# Altium PCB version2.PcbDoc
Units mm, origin at the board's own origin, x right, y up, seen from the top; angles counter-clockwise.
Board outline 110.11 x 70.14 mm, 2 copper layers (Top Layer, Bottom Layer), stack 0.711 mm thick; 36 components, 48 nets, 169 pads, 6 vias.
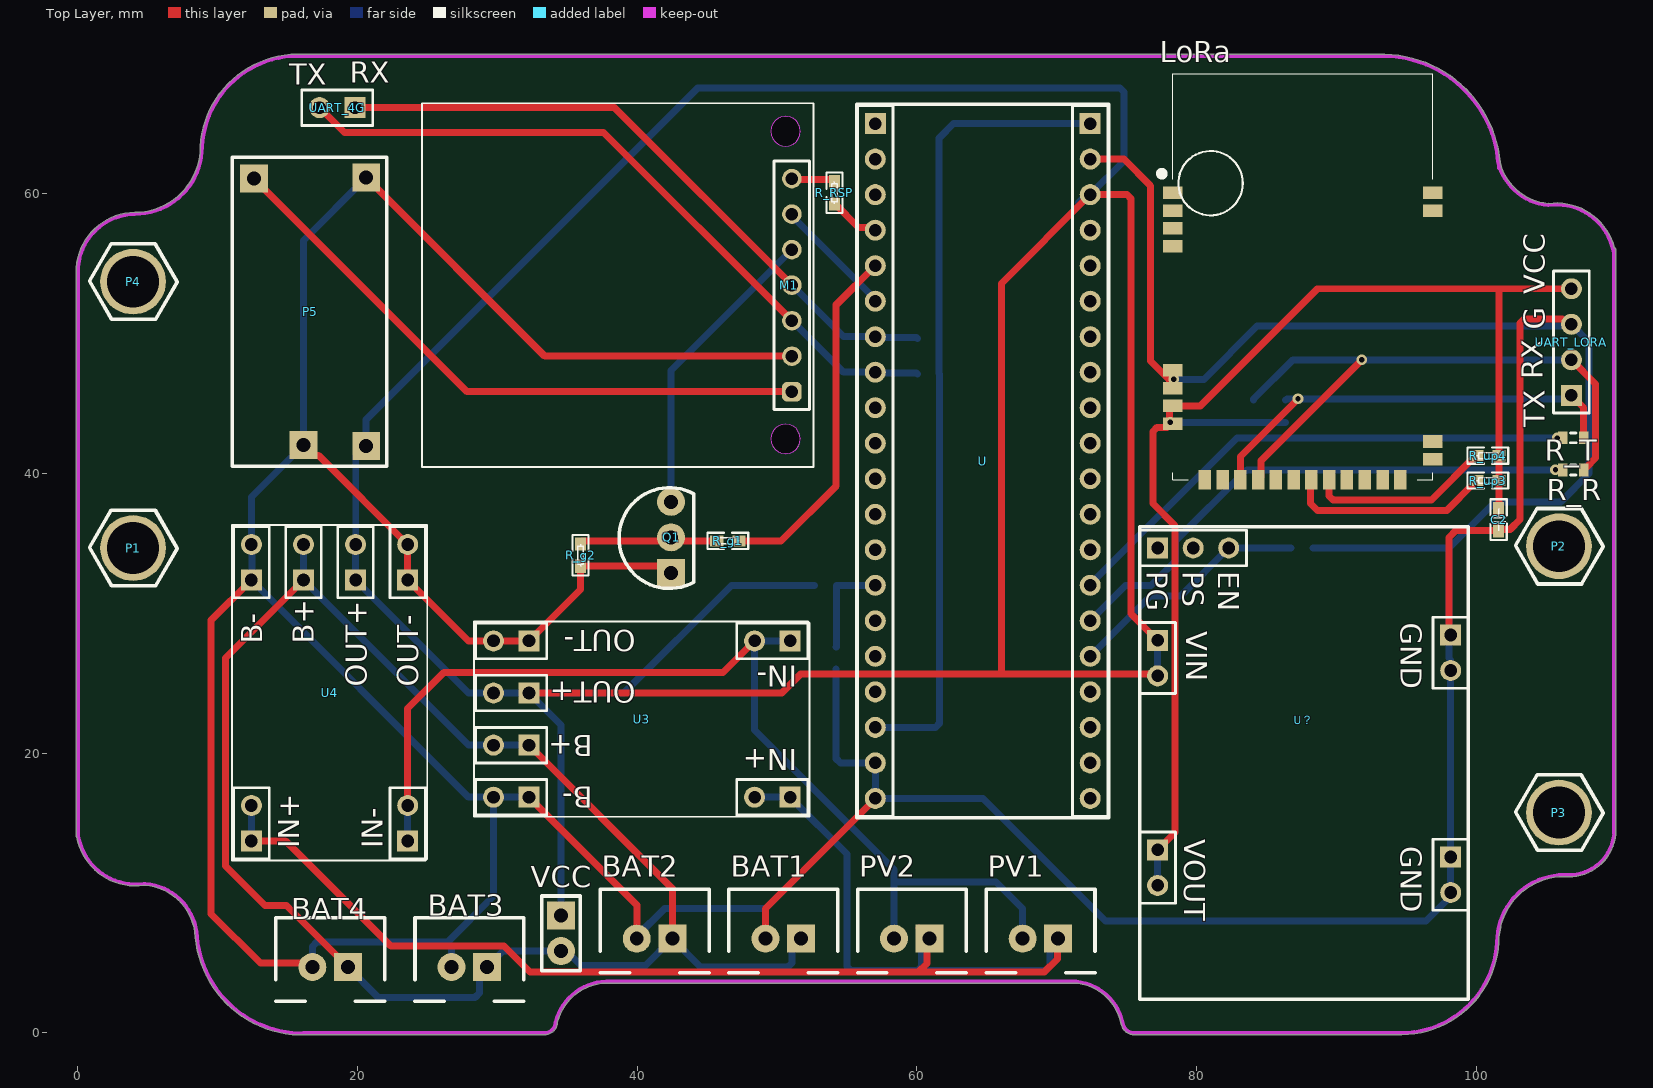
[diagram p0: Top Layer view]
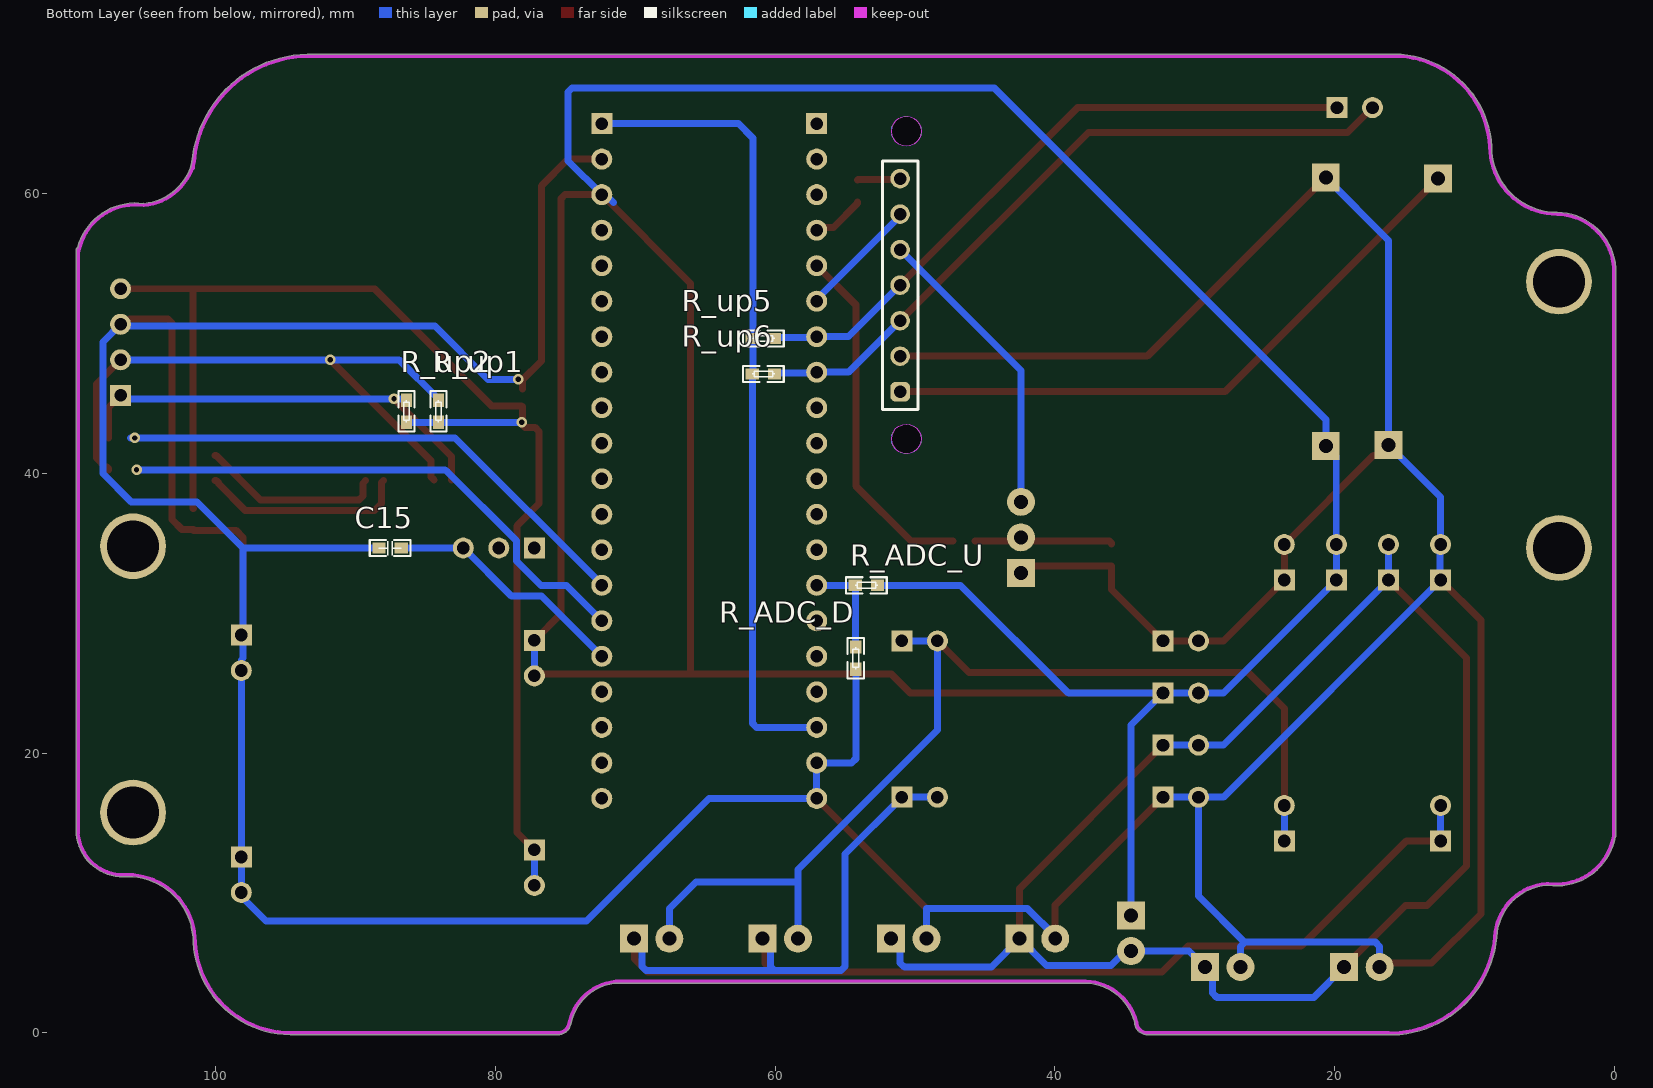
[diagram p1: Bottom Layer view, seen from below]
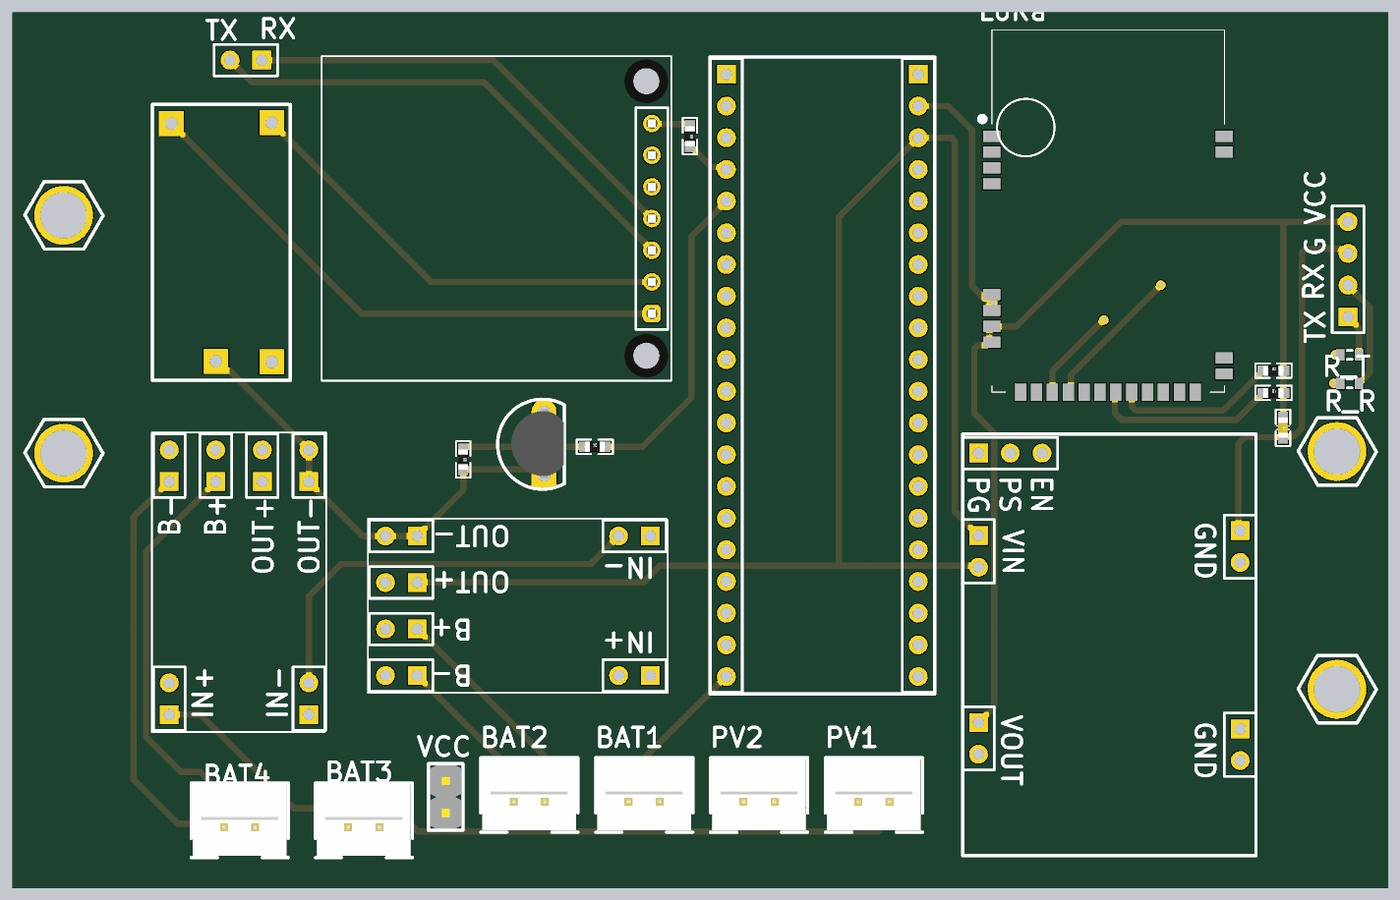
[diagram p2: 3D render of the assembled board from above, using the file's embedded part models]
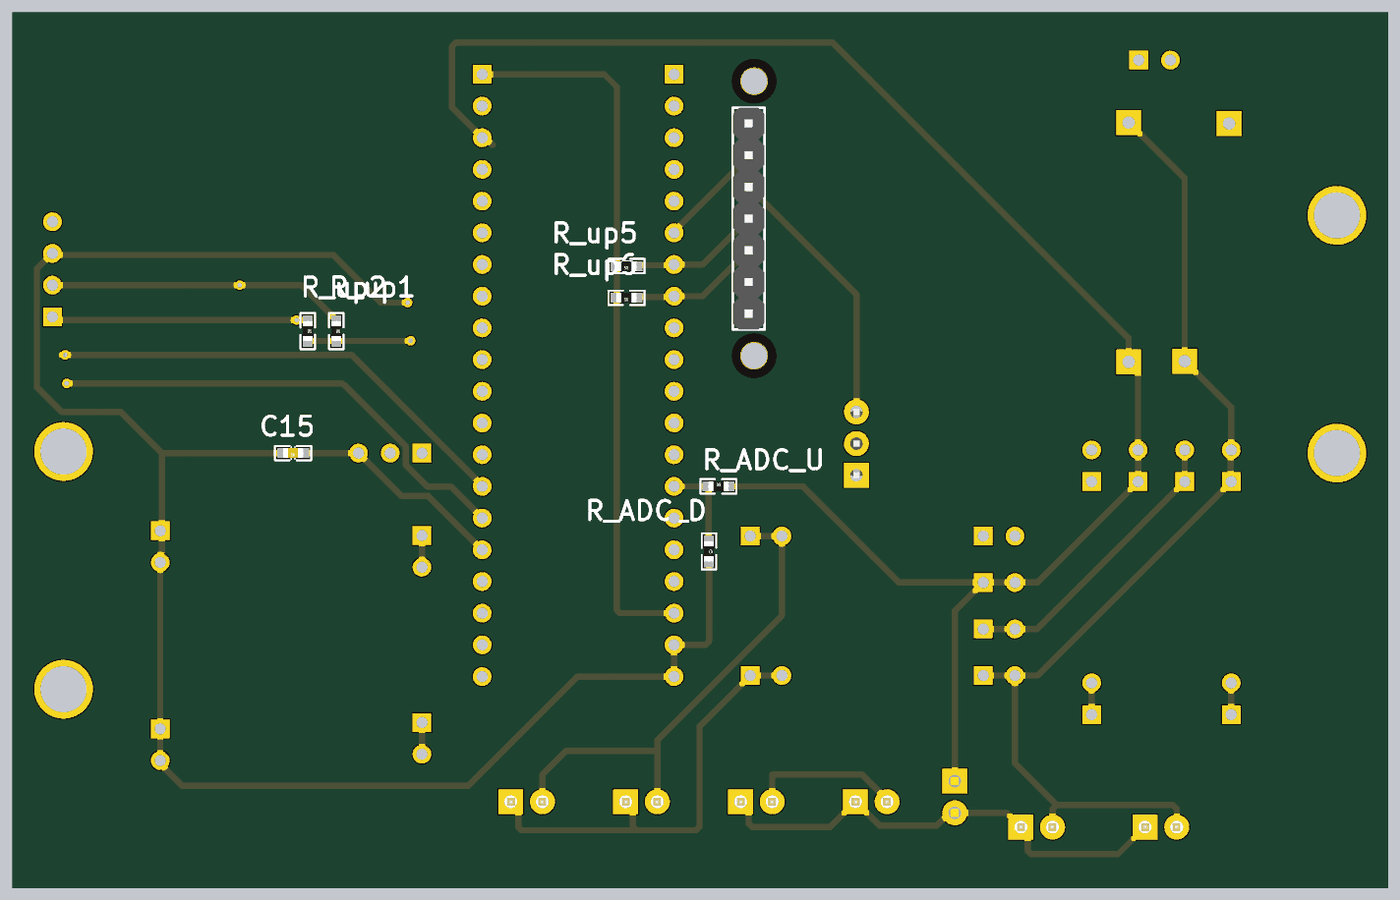
[diagram p3: 3D render of the assembled board from below, using the file's embedded part models]

## Layer stack, top to bottom
Top Solder: solder mask 0.0102, Solder Resist, Dk 3.5
Top Layer: signal copper 0.0356
Dielectric 1: dielectric 0.32, FR-4, Dk 4.8
Dielectric2: dielectric 0.32, FR-4, Dk 4.8
Bottom Layer: signal copper 0.0356
Bottom Solder: solder mask 0.0102, Solder Resist, Dk 3.5

## Board outline
8.39,6.847 cw(c8.517,6.858) 8.39,6.852 ccw(c4.508,6.667) 4.816,10.541 cw(c4.826,10.668) 4.762,10.558 cw(c4.699,10.668) 4.716,10.542 cw(c4.127,14.796) -0.095,14.012 cw(c0,14.097) -0.127,14.097 -0.127,54.356 cw(c4.127,54.419) 4.062,58.674 cw(c4.064,58.547) 4.065,58.674 ccw(c4.06,63.369) 8.754,63.369 ccw(c4.06,63.369) 8.754,63.372 cw(c8.882,63.373) 8.755,63.38 cw(c15.744,62.988) 16.133,69.977 92.961,69.977 cw(c93.281,61.531) 101.704,62.241 ccw(c105.474,63.182) 105.152,59.31 cw(c105.727,55.054) 109.885,56.131 cw(c109.855,56.007) 109.982,56.007 109.982,55.624 ccw(c109.855,55.626) 109.982,55.626 ccw(c109.855,55.626) 109.982,55.628 109.982,55.624 109.982,14.224 cw(c109.855,14.224) 109.982,14.212 cw(c106.616,14.541) 106.293,11.176 ccw(c106.303,6.481) 101.609,6.478 ccw(c106.303,6.481) 101.609,6.477 ccw(c101.481,6.477) 101.609,6.478 101.609,6.477 cw(c101.481,6.477) 101.608,6.47 cw(c94.619,6.862) 94.227,-0.127 cw(c94.234,0) 94.227,-0.127 75.572,-0.127 cw(c75.565,0) 75.572,-0.127 cw(c75.519,0.791) 74.609,0.662 cw(c74.71,0.739) 74.585,0.712 ccw(c71.038,-0.07) 70.9,3.56 cw(c70.866,3.683) 70.866,3.556 70.81,3.556 ccw(c71.038,-0.07) 70.731,3.55 cw(c70.72,3.677) 70.681,3.556 62.674,3.556 46.292,3.556 cw(c46.292,3.683) 46.291,3.556 ccw(c46.291,3.683) 46.292,3.556 46.291,3.556 38.1,3.556 cw(c38.1,3.683) 38.093,3.556 cw(c37.91,-0.191) 38.094,3.556 38.093,3.556 ccw(c37.91,-0.191) 34.278,0.749 cw(c33.393,0.757) 33.402,-0.127 cw(c33.401,0) 33.401,-0.127 16.77,-0.127 cw(c16.07,7.553)

## Design rules (kind name [scope] priority, off if disabled: settings)
Clearance [All] p1: gap=0.254 ignorepadtopadclearanceinfootprint=FALSE except(0: Arc-Hole Track-Hole SMDPad-Hole THPad-Hole Via-Hole Fill-Hole Poly-Hole Region-Hole Text-Hole)
PolygonConnect [All] p1: connectstyle=Relief reliefconductorwidth=0.254 reliefentries=4 polygonreliefangle="90 Angle" airgapwidth=0.254
RoutingVias [All] p1: holewidth=0.711 width=1.27 viastyle="Through Hole" minholewidth=0.711 minwidth=1.27 maxholewidth=0.711 maxwidth=1.27
SolderMaskExpansion [All] p1: expansion=0.102 istentingtop=FALSE
Width [All] p1: maxlimit=1.254 minlimit=0.254 preferedwidth=0.254
30 further rules are at their usual default settings.

## Components (designator, comment, footprint, x,y, rotation, side; value= is the part's Value field where it differs from the comment)
BAT1 "UART_4G" XH-2P 50.433,6.731 r180 top
BAT2 "UART_4G" XH-2P 41.233,6.731 r180 top
BAT3 "UART_4G" XH-2P 27.982,4.699 r180 top
BAT4 "UART_4G" XH-2P 18.034,4.699 r180 top
C2 "2.2uf" 0603-C 101.6,36.703 r270 top
C15 "2.2uf" 0603-C 87.535,34.671 r0 bottom
LoRa "WH-L101-L_Lib_V1.1" SMD-44_18.22X26.65X1.27P 78.281,39.551 r0 top
M1 "cat1" MCore724 52.609,40.474 r90 top
P1 "铜柱孔" 铜柱孔 3.937,34.671 r0 top
P2 "铜柱孔" 铜柱孔 105.918,34.798 r0 top
P3 "铜柱孔" 铜柱孔 105.918,15.748 r0 top
P4 "铜柱孔" 铜柱孔 3.937,53.721 r0 top
P5 "boost" 锂电池升压 22.098,40.513 r90 top
PV1 "UART_4G" XH-2P 68.834,6.731 r180 top
PV2 "UART_4G" XH-2P 59.634,6.731 r180 top
Q1 "三极管(NPN)" TO-92 42.418,35.433 r90 top
R_ADC_D "10K" 0603-R 54.229,26.797 r270 bottom
R_ADC_U "10K" 0603-R 53.467,32.004 r180 bottom
R_g1 "10K" 0603-R 46.482,35.179 r0 top value=4.7K
R_g2 "10K" 0603-R 35.941,34.163 r270 top value=4.7K
R_R "330Ω" J1-0603 106.934,40.249 r0 top value=1K
R_RSP "10K" 0603-R 54.102,60.071 r270 top value=4.7K
R_T "330Ω" J1-0603 106.934,42.545 r0 top value=1K
R_up1 "10K" 0603-R 84.074,44.45 r270 bottom
R_up2 "10K" 0603-R 86.36,44.45 r270 bottom
R_up3 "10K" 0603-R 100.838,39.497 r0 top
R_up4 "10K" 0603-R 100.838,41.275 r0 top
R_up5 "10K" 0603-R 60.833,49.657 r0 bottom value=4.7K
R_up6 "10K" 0603-R 60.833,47.117 r0 bottom value=4.7K
U "STM32最小系统" STM32最小系统 55.499,15.367 r0 top
U3 "BatCharge" Bat_Charge 51.435,28.66 r180 top
U4 "BatCharge" Bat_Charge 24.215,13.208 r90 top
UART_4G "UART_4G" HDR1X2 19.812,66.167 r180 top
UART_LORA "XH接线座-4P" HDR1X4 106.807,45.593 r90 top
U？ "TPS63020_Module" TP63020_MODULE 75.939,2.165 r0 top
VCC "UART_4G" Header1X2 34.544,7.112 r270 top

## Footprints (in the part's own frame and the unit in brackets; to place one, negate y for a bottom-side part, rotate by r counter-clockwise, add the part's x,y. Pads: shape width x height; smd on the part's side, far side on the other; paste and mask are expansions set on the pad)
0603-C [mm]
  rect 0.953x0.8 smd: 1(-0.794,0) 2(0.794,0)
  silkscreen extent -1.45,-0.58 1.45,0.58, body extent -0.8,-0.4 0.8,0.4, height 0.3
0603-R [mm]
  rect 0.953x0.8 smd: 1(-0.794,0) 2(0.794,0)
  silkscreen extent -1.45,-0.58 1.45,0.58, body extent -0.8,-0.4 0.8,0.4, height 0.3
Bat_Charge [mm] "充电模块"
  rect 1.5x1.5 hole 0.9: 1(0.508,11.811) 2(0.508,0.635) 3(19.177,0.635) 4(19.177,4.36) 5(19.177,8.086) 6(19.177,11.811)
  round 1.5 hole 0.9: 1(3.048,11.811) 2(3.048,0.635) 3(21.717,0.635) 4(21.717,4.36) 5(21.717,8.086) 6(21.717,11.811)
  Top Layer lines w0.254: 21.717,4.445 21.717,4.36
  silkscreen extent -0.89,-0.76 23.11,13.21
HDR1X2 [mm] "Connector; Header; 2 Position"
  rect 1.5x1.5 hole 0.9: 1(0,0)
  round 1.5 hole 0.9: 2(2.54,0)
  silkscreen extent -1.27,-1.27 3.81,1.27
HDR1X4 [mm] "Connector; Header; 4 Position"
  rect 1.5x1.5 hole 0.9: 1(0,0)
  round 1.5 hole 0.9: 2(2.54,0) 3(5.08,0) 4(7.62,0)
  silkscreen extent -1.27,-1.27 8.89,1.27
Header1X2 [mm]
  rect 2x2 hole 1: 1(-1.27,0)
  round 2 hole 1: 2(1.27,0)
  silkscreen extent -2.67,-1.38 2.67,1.38, body extent -2.54,-1.24 2.54,1.24, height 7.87
J1-0603 [mm] "Chip Resistor, Body 1.6x0.8mm, IPC High Density"
  rect 0.7x0.9 smd: 1(-0.75,0) 2(0.75,0)
  silkscreen extent -0.2,-0.35 0.2,0.35, body extent -0.85,-0.48 0.85,0.48, height 0.9
MCore724 [mm]
  round 2.1 hole 2.1 unplated: 0(2,1.997) 0(24,1.997)
  rrect50% 1.4x1.4 hole 0.9: 1(5.373,1.555)
  round 1.4 hole 0.9: 2(7.913,1.555) 3(10.453,1.555) 4(12.993,1.555) 5(15.533,1.555) 6(18.073,1.555) 7(20.613,1.555)
  Top Layer pour cut-out: 22.229,1.997 22.263,1.651 22.364,1.319 22.527,1.013 22.748,0.744 23.016,0.524 23.322,0.36 23.654,0.259 24,0.225 24,0.225 24.346,0.259 24.678,0.36 24.984,0.524 25.252,0.744 25.473,1.013 25.636,1.319 25.737,1.651 25.771,1.997 25.771,1.997 25.737,2.342 25.636,2.674 25.473,2.981 25.252,3.249 24.984,3.469 24.678,3.633 24.346,3.734 24,3.768 24,3.768 23.654,3.734 23.322,3.633 23.016,3.469 22.748,3.249 22.527,2.981 22.364,2.674 22.263,2.342 22.229,1.997
  Top Layer pour cut-out: 0.229,1.997 0.263,1.651 0.364,1.319 0.527,1.013 0.748,0.744 1.016,0.524 1.322,0.36 1.654,0.259 2,0.225 2,0.225 2.346,0.259 2.678,0.36 2.984,0.524 3.252,0.744 3.473,1.013 3.636,1.319 3.737,1.651 3.771,1.997 3.771,1.997 3.737,2.342 3.636,2.674 3.473,2.981 3.252,3.249 2.984,3.469 2.678,3.633 2.346,3.734 2,3.768 2,3.768 1.654,3.734 1.322,3.633 1.016,3.469 0.748,3.249 0.527,2.981 0.364,2.674 0.263,2.342 0.229,1.997
  Bottom Layer circle w0: c24,1.997 r1.05
  Bottom Layer circle w0: c2,1.997 r1.05
  Bottom Layer pour cut-out: 22.242,1.997 22.275,1.654 22.375,1.324 22.538,1.02 22.757,0.753 23.023,0.534 23.327,0.372 23.657,0.272 24,0.238 24,0.238 24.343,0.272 24.673,0.372 24.977,0.534 25.243,0.753 25.462,1.02 25.625,1.324 25.725,1.654 25.758,1.997 25.758,1.997 25.725,2.34 25.625,2.67 25.462,2.974 25.243,3.24 24.977,3.459 24.673,3.621 24.343,3.721 24,3.755 24,3.755 23.657,3.721 23.327,3.621 23.023,3.459 22.757,3.24 22.538,2.974 22.375,2.67 22.275,2.34 22.242,1.997
  Bottom Layer pour cut-out: 0.242,1.997 0.275,1.654 0.375,1.324 0.538,1.02 0.757,0.753 1.023,0.534 1.327,0.372 1.657,0.272 2,0.238 2,0.238 2.343,0.272 2.673,0.372 2.977,0.534 3.243,0.753 3.462,1.02 3.625,1.324 3.725,1.654 3.758,1.997 3.758,1.997 3.725,2.34 3.625,2.67 3.462,2.974 3.243,3.24 2.977,3.459 2.673,3.621 2.343,3.721 2,3.755 2,3.755 1.657,3.721 1.327,3.621 1.023,3.459 0.757,3.24 0.538,2.974 0.375,2.67 0.275,2.34 0.242,1.997
  Keep-Out Layer board cut-out: 22.941,1.997 22.977,1.722 23.083,1.467 23.251,1.248 23.47,1.079 23.726,0.974 24,0.938 24,0.938 24.274,0.974 24.53,1.079 24.749,1.248 24.917,1.467 25.023,1.722 25.059,1.997 25.059,1.997 25.023,2.271 24.917,2.526 24.749,2.745 24.53,2.914 24.274,3.02 24,3.056 24,3.056 23.726,3.02 23.47,2.914 23.251,2.745 23.083,2.526 22.977,2.271 22.941,1.997
  Keep-Out Layer board cut-out: 0.941,1.997 0.977,1.722 1.083,1.467 1.251,1.248 1.47,1.079 1.726,0.974 2,0.938 2,0.938 2.274,0.974 2.53,1.079 2.749,1.248 2.917,1.467 3.023,1.722 3.059,1.997 3.059,1.997 3.023,2.271 2.917,2.526 2.749,2.745 2.53,2.914 2.274,3.02 2,3.056 2,3.056 1.726,3.02 1.47,2.914 1.251,2.745 1.083,2.526 0.977,2.271 0.941,1.997
  silkscreen extent 0,0 26,28, body extent 4.1,0.29 21.88,2.83, height 8.54
SMD-44_18.22X26.65X1.27P [mm] "WH-L101封装"
  rect 1.4x0.9 smd: 1(0,20.52) 2(0,19.25) 3(0,17.98) 4(0,16.71) 11(0,7.82) 12(0,6.55) 13(0,5.28) 14(0,4.01) 29(18.62,1.47) 30(18.62,2.74) 43(18.62,19.25) 44(18.62,20.52)
  rect 0.9x1.4 smd: 17(2.31,0) 18(3.58,0) 19(4.85,0) 20(6.12,0) 21(7.39,0) 22(8.66,0) 23(9.93,0) 24(11.2,0) 25(12.47,0) 26(13.74,0) 27(15.02,0) 28(16.29,0)
  Top Layer pour cut-out: 0.33,23.622 5.08,23.622 5.08,18.796 0.33,18.796
  silkscreen extent -0.8,0 18.62,29.05
STM32最小系统 [mm] "STM32最小系统"
  rect 1.5x1.5 hole 0.9: 1(1.524,49.657) 21(16.891,49.657)
  round 1.5 hole 0.9: 2(1.524,47.117) 3(1.524,44.577) 4(1.524,42.037) 5(1.524,39.497) 6(1.524,36.957) 7(1.524,34.417) 8(1.524,31.877) 9(1.524,29.337) 10(1.524,26.797) 11(1.524,24.257) 12(1.524,21.717) 13(1.524,19.177) 14(1.524,16.637) 15(1.524,14.097) 16(1.524,11.557) 17(1.524,9.017) 18(1.524,6.477) 19(1.524,3.937) 20(1.524,1.397) 22(16.891,47.117) 23(16.891,44.577) 24(16.891,42.037) 25(16.891,39.497) 26(16.891,36.957) 27(16.891,34.417) 28(16.891,31.877) 29(16.891,29.337) 30(16.891,26.797) 31(16.891,24.257) 32(16.891,21.717) 33(16.891,19.177) 34(16.891,16.637) 35(16.891,14.097) 36(16.891,11.557) 37(16.891,9.017) 38(16.891,6.477) 39(16.891,3.937) 40(16.891,1.397)
  Bottom Layer lines w0.254: 16.891,19.177 17.129,19.415
  silkscreen extent 0.21,0 18.22,51.05
TO-92 [mm]
  rect 2x2 hole 1: 1(-2.54,0)
  round 2 hole 1: 2(0,0) 3(2.54,0)
  silkscreen extent -3.65,-1.63 3.55,3.72, body extent -2.79,-1.59 2.79,2.61, height 10
TP63020_MODULE [mm] "升压模块"
  round 1.5 hole 0.9: 1(1.277,23.362) 2(1.277,8.376) 3(22.232,7.868) 4(22.232,23.743) 5(6.357,32.506) 6(3.817,32.506)
  rect 1.5x1.5 hole 0.9: 1(1.277,25.902) 2(1.277,10.916) 3(22.232,10.408) 4(22.232,26.283) 7(1.277,32.506)
  Bottom Layer lines w0.254: 1.143,25.768 1.277,25.902
  silkscreen extent 0.01,0.25 23.5,34.03
XH-2P [mm]
  rect 2x2 hole 1: 1(-1.27,0)
  round 2 hole 1: 2(1.27,0)
  silkscreen extent -3.9,-3.53 3.88,2.44, body extent -3.75,-3.4 3.75,2.3, height 7
铜柱孔 [mm]
  round 4.7 hole 3.7: 1(0,0)
  silkscreen extent -3.1,-2.7 3.16,2.7
锂电池升压 [mm] "升压至5/8/9/12V"
  rect 2x2 hole 1: 1(1.524,5.969) 2(1.467,1.482) 3(20.574,9.525) 4(20.644,1.482)
  silkscreen extent 0,0 22.1,11.05

## Part data
BAT1 BAT2 BAT3 BAT4 PV1 PV2 UART_4G VCC: library part "Header 2", "Header, 2-Pin", LatestRevisionDate=17-Jul-2002, LatestRevisionNote="Re-released for DXP Platform.", Publisher="Altium Limited"
C2 C15: library part Cap, "Capacitor", LatestRevisionDate=17-Jul-2002, LatestRevisionNote="Re-released for DXP Platform.", PackageDescription="Radial Cap, Thru-Hole; 2 Leads; 0.3 in Pin Spacing", PackageReference=RAD-0.3, Published=8-Jun-2000, Publisher="Altium Limited"
M1: library part MCore_A724UG, "4G透传模块"
P5: library part Boost12V, "锂电池升压至5/8/9/12V"
R_ADC_D R_ADC_U R_g1 R_g2 R_RSP R_up1 R_up2 R_up3 R_up4 R_up5 R_up6: library part Res1, "贴片电阻", LatestRevisionDate=17-Jul-2002, LatestRevisionNote="Re-released for DXP Platform.", PackageReference=AXIAL-0.4, Published=8-Jun-2000, Publisher="Altium Limited"
R_R R_T: library part Res3, "Resistor", LatestRevisionDate=29-May-2009, LatestRevisionNote="IPC-7351 Footprint Added.", PackageDescription="Chip Resistor", PackageReference=J1-0603, Published=8-Jun-2000, Publisher="Altium Limited"
U3 U4: "电池充电模块"
U？: "升压模块模块"

## Via types
v1: diameter 0.762, hole 0.381, Top Layer to Bottom Layer, 6 vias

## Nets (pads, with @x,y where several pads share a name; then routed paths per layer and width w, separated by ;. In a path a pad name is that pad's centre, name@x,y a point inside that pad or via, vN(x,y) a via of type N, cw(c..) or ccw(c..) an arc to the next point about the centre after c; other vN are vias at no path point)
5V: P5.2 R_ADC_U.2 U3.4 U4.4 U.23 U？.1 VCC.1 | length 262
  Top Layer w0.5: U3.4@32.258,24.299 50.334,24.299 51.689,25.654 66.04,25.654 ; U？.1@77.216,25.527 77.089,25.654 66.04,25.654 ; U？.1@77.216,28.067 75.311,29.972 75.311,59.651 75.018,59.944 U.23 66.04,53.594 66.04,25.654
  Bottom Layer w0.5: VCC.1 34.544,22.013 U3.4@32.258,24.299 ; R_ADC_U.2 46.736,32.004 39.031,24.299 U3.4@32.258,24.299 ; 71.548,59.373 72.119,59.944 U.23 74.803,62.357 74.803,67.271 74.51,67.564 44.323,67.564 20.616,43.857 P5.2 19.866,41.23 19.866,34.937 19.854,34.925 19.854,32.385 27.94,24.299 29.718,24.299 U3.4@32.258,24.299 ; U？.1@77.216,25.527 U？.1@77.216,28.067
Boost_EN: U.11
GND: BAT1.2 BAT2.2 BAT3.2 BAT4.2 C2.2 C15.2 LoRa.11 LoRa.12 M1.2 P5.1 P5.4 Q1.1 R_ADC_D.2 R_g2.2 U3.3 U3.6 U4.3 U4.6 U.19 U.20 U.22 UART_LORA.3 U？.3 U？.4 | length 425.6
  Top Layer w0.5: U4.6@12.404,32.385 9.525,29.506 9.525,8.509 13.048,4.986 16.477,4.986 BAT4.2 ; P5.1 16.879,41.287 17.218,41.287 23.58,34.925 23.58,32.385 27.94,28.025 29.718,28.025 32.258,28.025 35.941,31.708 R_g2.2 41.942,33.369 Q1.1 ; P5.4 33.386,48.387 M1.2 ; U3.6@32.258,16.849 39.963,9.144 BAT2.2 ; Q1.1@42.717,33.383 Q1.1@42.876,33.224 ; BAT1.2 49.163,8.904 U.20 ; U.22 74.803,62.484 76.708,60.579 76.708,48.055 78.081,46.682 LoRa.12@78.081,46.047 ; U？.4@98.171,28.448 98.044,28.575 98.044,35.433 98.552,35.941 101.6,35.941 C2.2@101.6,35.985 ; C2.2 101.703,36.013 102.434,36.013 103.124,36.703 103.124,50.761 103.417,51.054 106.155,51.054 106.536,50.673 UART_LORA.3
  Bottom Layer w0.5: BAT4.2 16.764,6.184 17.057,6.477 26.416,6.477 ; P5.4 16.129,56.67 P5.1 15.379,41.287 12.404,38.312 12.404,34.925 12.446,34.883 12.446,32.427 12.404,32.385 27.94,16.849 U3.6@29.718,16.849 ; BAT3.2 26.709,4.702 26.709,6.184 26.416,6.477 ; U3.6@32.258,16.849 U3.6@29.718,16.849 ; BAT2.2 39.963,6.904 41.963,8.904 49.163,8.904 BAT1.2 ; R_ADC_D.2 54.229,19.597 54.522,19.304 U.19 ; U.19@57.023,19.05 U.20 64.731,16.764 73.494,8.001 96.41,8.001 98.171,9.762 98.171,10.033 98.171,12.573 98.171,25.908 98.171,26.67 98.044,26.797 U？.4@98.044,28.575 ; v1(78.359,46.736) 80.518,46.736 84.328,50.546 106.68,50.546 UART_LORA.3 108.061,49.419 108.061,39.989 106.045,37.973 101.346,37.973 98.044,34.671 ; C15.2 98.044,34.671 ; U？.4@98.171,28.448 U？.4@98.044,28.575 ; 26.416,6.477 29.718,9.779 U3.6@29.718,16.849 ; U？.4@98.044,28.575 98.044,34.671
HOST_WAKE: LoRa.24 R_up4.1 | length 13.2
  Top Layer w0.5: LoRa.24@89.281,39.497 89.481,39.297 89.481,38.393 89.774,38.1 96.793,38.1 99.968,41.275 R_up4.1
LoRa_EN: C15.1 U.36 U？.5 | length 17.6
  Bottom Layer w0.5: U.36 76.708,31.242 78.867,31.242 U？.5 C15.1
Module_EN: R_g1.2 U.5 | length 25.5
  Top Layer w0.5: R_g1.2 50.292,35.179 54.229,39.116 54.229,52.07 U.5
NetM1_5: M1.5 Q1.3 | length 20.9
  Bottom Layer w0.5: Q1.3@42.418,38.685 42.418,47.371 M1.5
NetM1_7: M1.7 R_RSP.1 | length 3.1
  Top Layer w0.5: M1.7 51.102,61.039 54.054,61.039 R_RSP.1@54.102,60.992
NetQ1_2: Q1.2 R_g1.1 R_g2.1 | length 10.1
  Top Layer w0.5: R_g2.1 35.941,35.033 36.091,35.183 42.168,35.183 Q1.2 42.672,35.179 R_g1.1
NRST: U.17
PA1: M1.6 U.6 | length 8.9
  Top Layer w0.5: M1.6@51.054,58.42 M1.6 ; U.6 U.6@57.023,52.451
  Bottom Layer w0.5: M1.6 51.054,58.42 57.023,52.451 U.6
PA2: M1.4 R_up5.1 U.7 UART_4G.1 | length 47.1
  Top Layer w0.5: UART_4G.1 38.354,66.167 M1.4
  Bottom Layer w0.5: M1.4 54.737,49.784 U.7 57.087,49.721 59.976,49.721 R_up5.1
PA3: M1.3 R_up6.1 U.8 UART_4G.2 | length 50.7
  Top Layer w0.5: UART_4G.2 19.05,64.389 37.592,64.389 M1.3
  Bottom Layer w0.5: M1.3 54.737,47.244 U.8 57.087,47.18 59.976,47.18 R_up6.1
PA5: U.10
PA7: U.12
PA9: R_R.1 U.35 | length 38.3
  Bottom Layer w0.5: U.35 74.922,31.996 76.754,31.996 78.502,33.744 78.502,35.19 83.424,40.113 cw(c83.778,39.759) 83.778,40.259 v1@105.41,40.259
  other v1: 105.664,40.259
PA10: R_T.1 U.34 | length 38.1
  Bottom Layer w0.5: U.34 72.39,32.058 82.877,42.545 v1@106.084,42.545
  other v1: 105.791,42.545
PA11: U.33
PA12: U.32
PA15: U.31
PB0: U.13
PB1: R_ADC_D.1 R_ADC_U.1 U.14 | length 7.2
  Bottom Layer w0.5: R_ADC_D.1 54.245,27.607 54.245,31.988 R_ADC_U.1 U.14 U.14@57.039,31.988
PB3: U.30
PB4: U.29
PB5: U.28
PB6: U.27
PB7: U.26
PB8: U.25
PB9: U.24
PB10: U.15
PB11: U.16
PB12: U.40
PB13: U.39
PB14: U.38
PB15: U.37
PC13: U.2
PC14: U.3
PC15: R_RSP.2 U.4 | length 3.8
  Top Layer w0.5: R_RSP.2@54.102,59.404 54.102,59.328 55.835,57.595 56.832,57.595 U.4
PV_IN+: PV1.1 PV2.1 U3.1 U4.1 | length 105.7
  Top Layer w0.5: U4.1@12.404,13.716 14.859,13.716 22.372,6.203 30.461,6.203 32.326,4.338 60.091,4.338 ; PV2.1@60.154,7.481 PV2.1 60.706,6.533 60.706,4.953 60.091,4.338 ; PV1.1 70.044,6.671 70.044,5.274 69.108,4.338 60.091,4.338
  Bottom Layer w0.5: U4.1@12.404,13.716 U4.1@12.404,16.256 ; U3.1@48.387,16.849 50.927,16.849 54.991,12.785 54.991,4.738 55.284,4.445 60.032,4.445 ; PV2.1 60.325,6.152 60.325,4.738 60.032,4.445 ; PV1.1 69.508,6.135 69.508,4.738 69.215,4.445 60.032,4.445
PV_IN-: PV1.2 PV2.2 U3.2 U4.2 | length 76.4
  Top Layer w0.5: U4.2@23.58,16.256 23.58,23.199 26.162,25.781 46.143,25.781 U3.2@48.387,28.025
  Bottom Layer w0.5: U4.2@23.58,13.716 U4.2@23.58,16.256 ; U3.2@50.927,28.025 48.387,28.025 48.387,21.656 58.364,11.679 58.364,10.795 ; PV2.2 58.364,10.795 ; PV1.2 67.564,8.89 65.659,10.795 58.364,10.795
RXD_LORA: LoRa.20 R_R.2 R_up1.1 UART_LORA.2 | length 44.6
  Top Layer w0.5: LoRa.20 84.601,39.751 84.601,40.913 v1(91.821,48.133) ; UART_LORA.2 108.538,46.402 108.538,41.886 108.538,41.103 107.884,40.449 107.784,40.449 107.684,40.349 R_R.2
  Bottom Layer w0.5: R_up1.1 84.074,45.32 86.887,48.133 v1(91.821,48.133) UART_LORA.2
TXD_LORA: LoRa.19 R_T.2 R_up2.1 UART_LORA.1 | length 31.5
  Top Layer w0.5: LoRa.19 83.131,41.219 v1(87.251,45.339) ; UART_LORA.1 107.684,44.716 R_T.2
  Bottom Layer w0.5: R_up2.1 86.455,45.339 106.553,45.339 UART_LORA.1
VBAT: BAT1.1 BAT2.1 BAT3.1 BAT4.1 U3.5 U4.5 VCC.2 | length 115.1
  Top Layer w0.5: U4.5@16.129,32.385 10.541,26.797 10.541,11.938 13.376,9.103 14.9,9.103 BAT4.1 ; U3.5@32.258,20.574 42.503,10.329 BAT2.1
  Bottom Layer w0.5: U4.5@16.129,34.925 16.129,32.385 27.94,20.574 29.718,20.574 U3.5@32.258,20.574 ; BAT4.1 21.463,2.54 28.409,2.54 28.702,2.833 28.702,4.149 BAT3.1 30.395,5.842 VCC.2 34.95,5.842 35.966,4.826 40.598,4.826 BAT2.1 44.535,4.699 50.761,4.699 51.054,4.992 51.054,6.082 BAT1.1
VBAT_32: U.1
VCC3V3: R_up5.2 R_up6.2 U.18 U.21 | length 57.8
  Bottom Layer w0.5: U.18 61.334,21.844 61.627,22.137 R_up6.2 61.595,47.149 61.595,49.657 61.595,64.008 62.611,65.024 U.21
VCC_CAT1: M1.1 P5.3 | length 44.8
  Top Layer w0.5: P5.3 27.813,45.847 M1.1
VCC_LORA: C2.1 LoRa.13 LoRa.14 R_up1.2 R_up2.2 R_up3.2 R_up4.2 UART_LORA.4 U？.2 | length 92.5
  Top Layer w0.5: U？.2@77.216,13.081 78.47,14.335 78.47,36.261 76.877,37.854 76.877,43.014 77.17,43.307 77.881,43.307 78.081,43.507 78.081,44.777 78.135,44.831 80.264,44.831 88.646,53.213 101.632,53.213 ; C2.1 101.616,37.513 101.616,39.481 R_up3.2 R_up4.2 101.632,53.213 ; UART_LORA.4 101.632,53.213
  Bottom Layer w0.5: U？.2@77.216,10.541 U？.2@77.216,13.081 ; v1@78.105,43.688 78.137,43.656 R_up1.2 R_up2.2
  other v1: 78.121,43.672
Wake: LoRa.23 R_up3.1 | length 14.8
  Top Layer w0.5: LoRa.23@88.011,39.497 88.138,39.37 88.138,37.846 88.638,37.346 97.893,37.346 99.818,39.271 99.818,39.347 99.968,39.497 R_up3.1
pads on no net: LoRa.1 LoRa.2 LoRa.3 LoRa.4 LoRa.17 LoRa.18 LoRa.21 LoRa.22 LoRa.25 LoRa.26 LoRa.27 LoRa.28 LoRa.29 LoRa.30 LoRa.43 LoRa.44 M1.0 P1.1 P2.1 P3.1 P4.1 U.9 U？.6 U？.7

## Keep-outs
Keep-Out Layer:
  lines w0.254: 0,14.097 0,54.356 cw(c4.127,54.419) 4.064,58.547 ccw(c4.06,63.369) 8.882,63.373 cw(c15.744,62.988) 16.129,69.85 93.599,69.85 ; 0,14.224 ccw(c4.127,14.796) 4.699,10.668 ; 4.826,10.668 cw(c4.508,6.667) 8.517,6.858 ccw(c16.07,7.553) 16.764,0 ; 16.129,0 33.401,0 ccw(c33.393,0.757) 34.151,0.765 cw(c37.91,-0.191) 38.1,3.683 46.291,3.683 ; 70.72,3.677 cw(c71.038,-0.07) 74.71,0.739 ; 70.866,3.683 62.674,3.683 46.292,3.683 ; 74.728,0.746 ccw(c75.519,0.791) 75.565,0 94.996,0 ; 92.964,69.85 cw(c93.281,61.531) 101.6,61.849 ; 94.234,0 ccw(c94.619,6.862) 101.481,6.477 cw(c106.303,6.481) 106.299,11.303 ccw(c106.616,14.541) 109.855,14.224 109.855,56.007 ; 101.465,62.992 ccw(c105.474,63.182) 105.156,59.182 cw(c105.727,55.054) 109.855,55.626 ; 46.291,3.683 46.292,3.683

## Silkscreen, mask and mechanical layers (free items; w line width, h text height)
Top Overlay:
  text "RX" at 19.431,67.945 h1.52
  text "TX" at 15.113,67.818 h1.52
  text "VCC" at 104.902,52.832 h1.52 r90
  text "G" at 104.902,50.292 h1.52 r90
  text "RX" at 104.775,46.736 h1.52 r90
  text "TX" at 104.902,43.307 h1.52 r90

## Text inside footprints (layer, text, board x,y; h text height)
U3: Top Overlay "OUT-" at 39.878,28.787 h1.52 r180; Top Overlay "OUT+" at 39.878,25.104 h1.52 r180; Top Overlay "B+" at 36.83,21.294 h1.52 r180; Top Overlay "B-" at 36.83,17.611 h1.52 r180; Top Overlay "IN-" at 51.435,26.247 h1.52 r180; Top Overlay "IN+" at 51.435,20.278 h1.52 r180
U4: Top Overlay "IN+" at 15.833,13.208 h1.52 r90; Top Overlay "IN-" at 21.802,13.208 h1.52 r90; Top Overlay "B-" at 13.166,27.813 h1.52 r90; Top Overlay "B+" at 16.849,27.813 h1.52 r90; Top Overlay "OUT+" at 20.659,24.765 h1.52 r90; Top Overlay "OUT-" at 24.342,24.765 h1.52 r90
U？: Top Overlay "PG" at 76.454,33.02 h1.52 r270; Top Overlay "PS" at 78.994,33.02 h1.52 r270; Top Overlay "EN" at 81.534,33.02 h1.52 r270; Top Overlay "VOUT" at 79.121,13.843 h1.52 r270; Top Overlay "VIN" at 79.248,28.702 h1.52 r270; Top Overlay "GND" at 94.615,13.335 h1.52 r270; Top Overlay "GND" at 94.615,29.337 h1.52 r270